# Altium PCB DE-140824.PcbDoc (part 2 of 2)
Units mil, origin at the board's own origin, x right, y up, seen from the top; angles counter-clockwise.
Board outline 2677.17 x 5787.4 mil, 4 copper layers (Top Layer, GND, PWR, Bottom Layer), stack 30.634 mil thick; 176 components, 215 nets, 592 pads, 37 vias.
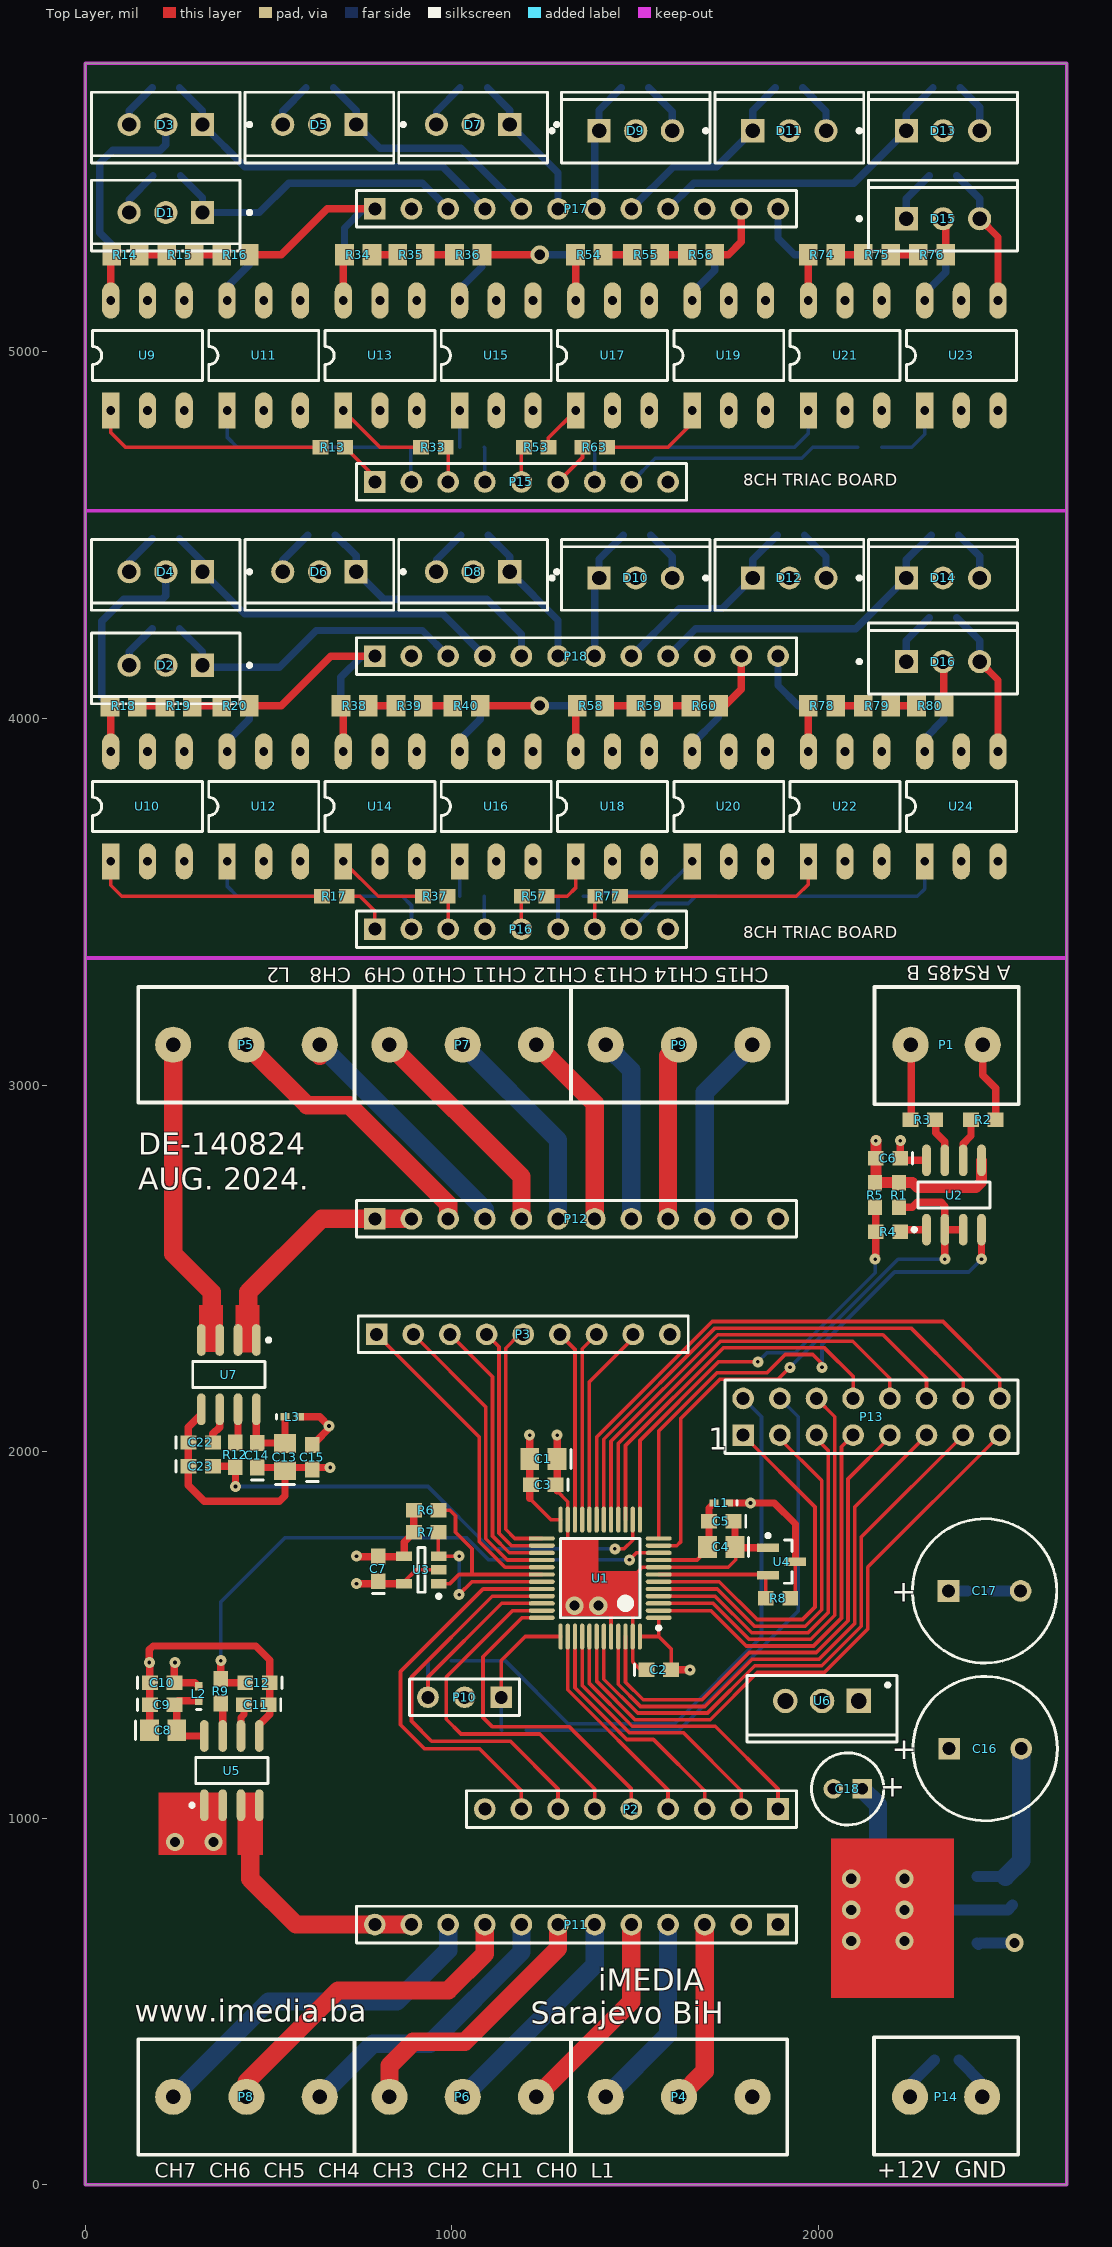
[diagram p0: Top Layer view]

## Via types
v1: diameter 30, hole 10, Top Layer to Bottom Layer, 24 vias
v2: diameter 50, hole 28, Top Layer to Bottom Layer, 13 vias

## Nets (pads, with @x,y where several pads share a name; then routed paths per layer and width w, separated by ;. In a path a pad name is that pad's centre, name@x,y a point inside that pad or via, vN(x,y) a via of type N, cw(c..) or ccw(c..) an arc to the next point about the centre after c; other vN are vias at no path point) (continued)
NetR63_2: R63.2 U19.1 | length 293.8
  Top Layer w10: R63.2 1590,4740 1655.71,4805.71 U19.1
NetR64_1: R64.1 U19.6 | length 150.6
  Bottom Layer w20: U19.6 1655.71,5160.71 1717.4,5222.4 R64.1
NetR64_2: R64.2 R65.1 | length 75.2
  Bottom Layer w20: R65.1 R64.2
NetR65_2: R65.2 R66.1 | length 80.2
  Bottom Layer w20: R66.1 R65.2
NetR67_2: R67.2 U20.1 | length 336.6
  Bottom Layer w10: R67.2 1390,3515 1400,3525 1570.71,3525 U20.1
NetR68_1: R68.1 U20.6 | length 170.4
  Top Layer w20: U20.6 U20.6@1655.71,3925.71
  Bottom Layer w20: U20.6 1655.71,3930.71 1727.4,4002.4 R68.1
NetR68_2: R68.2 R69.1 | length 75.2
  Bottom Layer w20: R69.1 R68.2
NetR69_2: R69.2 R70.1 | length 85.2
  Bottom Layer w20: R70.1 R69.2
NetR73_2: R73.2 U21.1 | length 592.2
  Bottom Layer w10: R73.2 1935,4740 1972.86,4777.86 U21.1
NetR74_1: R74.1 U21.6 | length 125.1
  Top Layer w20: R74.1 1972.86,5264.74 U21.6
NetR74_2: R74.2 R75.1 | length 75.2
  Top Layer w20: R74.2 R75.1
NetR75_2: R75.2 R76.1 | length 75.2
  Top Layer w20: R75.2 R76.1
NetR77_2: R77.2 U22.1 | length 590.1
  Top Layer w10: R77.2 1940,3515 1972.86,3547.86 U22.1
NetR78_1: R78.1 U22.6 | length 125.1
  Top Layer w20: R78.1 1972.86,4034.74 U22.6
NetR78_2: R78.2 R79.1 | length 75.2
  Top Layer w20: R78.2 R79.1
NetR79_2: R79.2 R80.1 | length 70.2
  Top Layer w20: R79.2 R80.1
NetR83_2: R83.2 U23.1 | length 196
  Bottom Layer w10: R83.2 2255,4740 2290,4775 U23.1
NetR84_1: R84.1 U23.6 | length 148.8
  Bottom Layer w20: U23.6 2290,5160 2347.4,5217.4 R84.1
NetR84_2: R84.2 R85.1 | length 75.2
  Bottom Layer w20: R85.1 R84.2
NetR85_2: R85.2 R86.1 | length 75.2
  Bottom Layer w20: R86.1 R85.2
NetR87_2: R87.2 U24.1 | length 584.8
  Bottom Layer w10: R87.2 2270,3515 2290,3535 U24.1
NetR88_1: R88.1 U24.6 | length 146.7
  Bottom Layer w20: U24.6 2290,3945 2342.4,3997.4 R88.1
NetR88_2: R88.2 R89.1 | length 70.2
  Bottom Layer w20: R89.1 R88.2
NetR89_2: R89.2 R90.1 | length 75.2
  Bottom Layer w20: R90.1 R89.2
PROT: 
PROTOCOL: P13.6 U1.3 | length 1160.5
  Top Layer w10: U1.3 1712.53,1586.1 1810.63,1488 1979.37,1488 2045,1553.63 2045,2095 P13.6
SWCLK: P10.1 R11.1 U1.37 | length 379.5
  Top Layer w10: P10.1 1135,1430 1200.55,1495.55 U1.37
  Bottom Layer w10: P10.1 1135,1241.54 R11.1
SWDIO: P10.3 R10.1 U1.34 | length 550.3
  Top Layer w10: P10.3 935,1385 1136.1,1586.1 U1.34
  Bottom Layer w10: R10.1 935,1426.54 P10.3
THY_CH0: P2.1 U1.41 | length 816.5
  Top Layer w10: U1.41 1375.47,1367.7 1492.18,1251 1719,1251 1890,1080 P2.1
THY_CH1: P2.2 U1.40 | length 736.7
  Top Layer w10: U1.40 1355.79,1361.93 1484.72,1233 1632,1233 1790,1075 P2.2
THY_CH2: P2.3 U1.39 | length 659.7
  Top Layer w10: U1.39 1336.1,1356.16 1477.27,1215 1550,1215 1690,1075 P2.3
THY_CH3: P2.4 U1.38 | length 583.9
  Top Layer w10: U1.38 1316.42,1350.39 1590,1076.81 P2.4
THY_CH4: P2.5 U1.36 | length 910.8
  Top Layer w10: U1.36 1191.28,1546.73 1085,1440.46 1085,1275 1110,1250 1320,1250 1490,1080 P2.5
THY_CH5: P2.6 U1.35 | length 989.4
  Top Layer w10: U1.35 1166.42,1566.42 985,1385 985,1270 1025,1230 1240,1230 1390,1080 P2.6
THY_CH6: P2.7 U1.33 | length 1098.6
  Top Layer w10: U1.33 1110.79,1605.79 890,1385 890,1265 945,1210 1160,1210 1290,1080 P2.7
THY_CH7: P2.8 U1.32 | length 1078.5
  Top Layer w10: P2.8 1190,1075 1075,1190 925,1190 860,1255 860,1400 1085.47,1625.47 U1.32
THY_CH8: P3.1 U1.29 | length 880.7
  Top Layer w10: P3.1 1075,2040 1075,1755 1145.47,1684.53 U1.29
THY_CH9: P3.2 U1.28 | length 816.2
  Top Layer w10: P3.2 1093,2122 1093,1762.46 1151.24,1704.21 U1.28
THY_CH10: P3.3 U1.27 | length 751.7
  Top Layer w10: P3.3 1111,2204 1111,1769.91 1157.01,1723.9 U1.27
THY_CH11: P3.4 U1.26 | length 687.3
  Top Layer w10: P3.4 1129,2286 1129,1777.37 1162.78,1743.58 U1.26
THY_CH12: P3.5 U1.25 | length 666.5
  Top Layer w10: P3.5 1185,2320 1147,2282 1147,1788 1171.73,1763.27 U1.25
THY_CH13: P3.6 U1.22 | length 522.6
  Top Layer w10: P3.6 1336.1,2278.9 U1.22
THY_CH14: P3.7 U1.21 | length 521.8
  Top Layer w10: U1.21 1355.79,2280.79 P3.7
THY_CH15: P3.8 U1.20 | length 555.1
  Top Layer w10: U1.20 1375.47,2190.47 1495,2310 P3.8
THY_CH_0: P4.2 P11.3 | length 499
  Top Layer w50: P4.2 1690,310 P11.3
THY_CH_1: P4.1 P11.4 | length 540.4
  Bottom Layer w50: P4.1 1590,410 P11.4
THY_CH_2: P6.3 P11.5 | length 577.7
  Top Layer w50: P6.3 1490,500 P11.5
THY_CH_3: P6.2 P11.6 | length 619.1
  Bottom Layer w50: P6.2 1390,600 P11.6
THY_CH_4: P6.1 P11.7 | length 742.5
  Top Layer w50: P6.1 830,325 895,390 1035,390 1290,645 P11.7
THY_CH_5: P8.3 P11.8 | length 788.6
  Bottom Layer w50: P8.3 785,385 940,385 1190,635 P11.8
THY_CH_6: P8.2 P11.9 | length 915
  Top Layer w50: P8.2 440,280 690,530 990,530 1090,630 P11.9
THY_CH_7: P8.1 P11.10 | length 985.7
  Bottom Layer w50: P8.1 500,500 850,500 990,640 P11.10
THY_CH_8: P5.2 P12.3 | length 770.2
  Top Layer w50: P5.2 605,2945 720,2945 990,2675 P12.3
THY_CH_9: P5.1 P12.4 | length 691.4
  Top Layer w50: P5.1@640,3080 P5.1
  Bottom Layer w50: P5.1 1090,2660 P12.4
THY_CH_10: P7.3 P12.5 | length 624.1
  Top Layer w50: P7.3 1190,2750 P12.5
THY_CH_11: P7.2 P12.6 | length 582.7
  Bottom Layer w50: P7.2 1290,2850 P12.6
THY_CH_12: P7.1 P12.7 | length 541.3
  Top Layer w50: P7.1 1390,2950 P12.7
THY_CH_13: P9.3 P12.8 | length 504
  Bottom Layer w50: P9.3 1490,3040 P12.8
THY_CH_14: P9.2 P12.9 | length 487.4
  Top Layer w50: P12.9 1590,3080 P9.2
THY_CH_15: P9.1 P12.10 | length 528.8
  Bottom Layer w50: P12.10 1690,2980 P9.1
USART1_DE: R1.2 U1.11 U2.2 U2.3 | length 1631
  Top Layer w10: U1.11 1613.58,1743.58 1625,1755 1625,2091.35 1730.65,2197 1889.5,2197 v1(1922.5,2230)
  Top Layer w20: R1.2 2256.54,2666.54 2270,2680 2335,2680 2345,2670 U2.2 ; v1(2345,2525) 2345,2605 U2.2 ; U2.3 U2.2
  Bottom Layer w10: v1(1922.5,2230) 2217.5,2525 v1(2345,2525)
USART1_RX: R4.1 R5.1 U1.13 | length 1227.3
  Top Layer w10: U1.13 1513.27,2030.53 1727.73,2245 v1(1835,2245) ; R5.1 R5.1@2156.54,2664.57
  Top Layer w20: v1(2155,2525) 2156.54,2526.54 R4.1 R5.1@2156.54,2664.57
  Bottom Layer w10: v1(1835,2245) 1860,2270 1937.04,2270 2155,2487.96 v1(2155,2525)
USART1_TX: U1.12 U2.4 | length 1519.4
  Top Layer w10: U1.12 1564.45,2056.26 1723.19,2215 1860,2215 1910,2265 1985,2265 2010,2240 v1(2010,2230)
  Top Layer w20: v1(2445,2525) U2.4
  Bottom Layer w10: v1(2010,2230) 2010,2292.04 2207.96,2490 2410,2490 v1(2445,2525)
pads on no net: U9.3 U9.5 U10.3 U10.5 U11.3 U11.5 U12.3 U12.5 U13.3 U13.5 U14.3 U14.5 U15.3 U15.5 U16.3 U16.5 U17.3 U17.5 U18.3 U18.5 U19.3 U19.5 U20.3 U20.5 U21.3 U21.5 U22.3 U22.5 U23.3 U23.5 U24.3 U24.5

## Polygon pours and split planes (outlines as drawn)
GND on GND "Bottom Layer-No Net" (solid, remove dead copper, pour order 2): 2100.25,3280 2100.25,2540.25 1975,2415 695,2415 670,2390 670,2170 110,2170 65,2125 65,1215 115,1165 710,1165 955,920 1965,920 2015,870 2015,70 2655,70 2655,3280

## Keep-outs
Keep-Out Layer:
  lines w10: 0,3346.46 2677.17,3346.46 ; 0,4566.93 2677.17,4566.93 ; 0,0 0,5787.4 2677.17,5787.4 2677.17,0 0,0

## Other copper
Top Layer:
  rectangle net L_2: 410,2270 475,2400
  rectangle net L2: 310,2271.32 375.39,2400
  rectangle net L_1: 415,900 485,1070
  rectangle net L1: 200,900 385,1070
  rectangle net GND: 1300,1655 1400,1760
  rectangle net GND: 1300,1550 1510,1675
  rectangle net 3V3: 2035,510 2370,945
Bottom Layer:
  rectangle net 3V3: 2035,510 2370,945

## Silkscreen, mask and mechanical layers (free items; w line width, h text height)
Top Overlay:
  text "8CH TRIAC BOARD" at 1795,4635 h33
  text "8CH TRIAC BOARD" at 1795,3400 h33
  text "A RS485 B" at 2525,3325 h40 r180
  text "CH15 CH14 CH13 CH12 CH11 CH10 CH9  CH8   L2" at 1865,3320 h40 r180
  text "DE-140824" at 145,2810 h60
  text "AUG. 2024." at 145,2715 h60
  text "iMEDIA" at 1400,530 h60
  text "www.imedia.ba" at 135,445 h60
  text "Sarajevo BiH" at 1215,440 h60
  text "CH7  CH6  CH5  CH4  CH3  CH2  CH1  CH0  L1" at 190,20 h40
  text "+12V  GND" at 2160,20 h45

## Text inside footprints (layer, text, board x,y; h text height)
C16: Top Overlay "+" at 2200.47,1160.47 h60
C17: Top Overlay "+" at 2198.9,1590.47 h60
C18: Top Overlay "+" at 2236.5,1109.53 h60 r180
P13: Top Overlay "1" at 1700,2005 h60